# EAGLE board test_path_thickness (EAGLE 7.6.0)

Size 100 x 80 mm. Coordinates in mm from the lower left corner, seen from the top.
Outline: 0,0 100,0 100,80 0,80 0,0
Copper layers (1*16): Top 0.035mm / dielectric 1.5mm / Bottom 0.035mm
Design rules "default": minimum track width 10mil, minimum drill 24mil, track to track 8mil, track to pad 8mil, pad to pad 8mil, via to via 8mil, smd to smd 8mil, copper to edge 40mil, drill to drill 8mil, minimum pad ring 10mil, minimum via ring 8mil, stop-mask expansion 4mil, vias tented up to drill 0mil, thermal gap 10mil

## Footprints (pad centres in the part's own frame; a part is rotated, then mirrored left to right if it is on the bottom)
6410-02 = drill 1.016 long: 1 1.27,0; 2 -1.27,0
0207/7 = drill 0.813 octagon: 1 -3.81,0; 2 3.81,0

## Placement (x,y rotation side)
J1  22-27-2021-02  [6410-02]  15.24,33.02 0 top
R1  [0207/7]  38.1,27.94 180 top
R2  [0207/7]  38.1,34.29 180 top

## Library data of the parts
J1 = con-molex; OC_FARNELL: unknown; OC_NEWARK: unknown
R1 R2 = rcl

## Nets
GND: J1.2 R1.2 R2.2
R1VCC: R1.1
R2VCC: R2.1
VCC: J1.1

## Tracks (layer width: path | path; a pad name or v marks a point on that pad's centre or on a via)
GND  (2 unrouted)